# Allegro board AAST_BOARD V1.brd
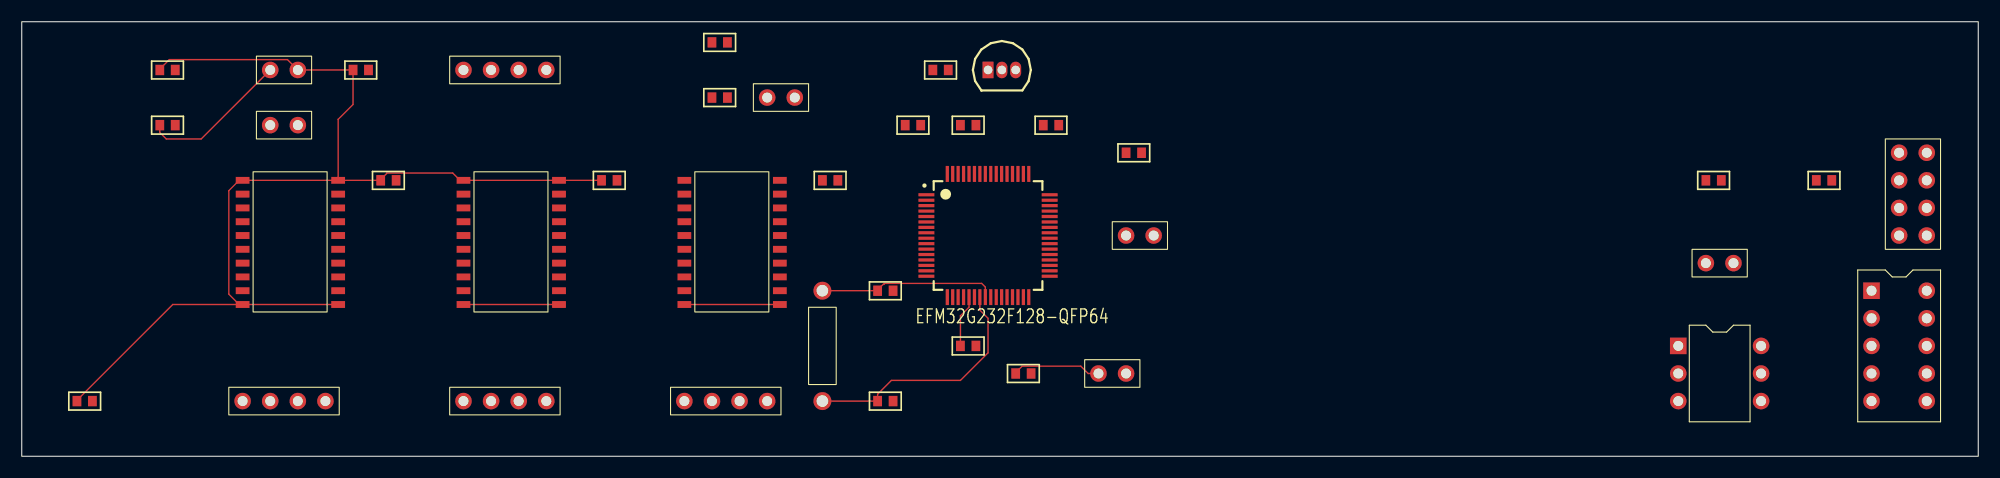
[diagram p0: board, top side]
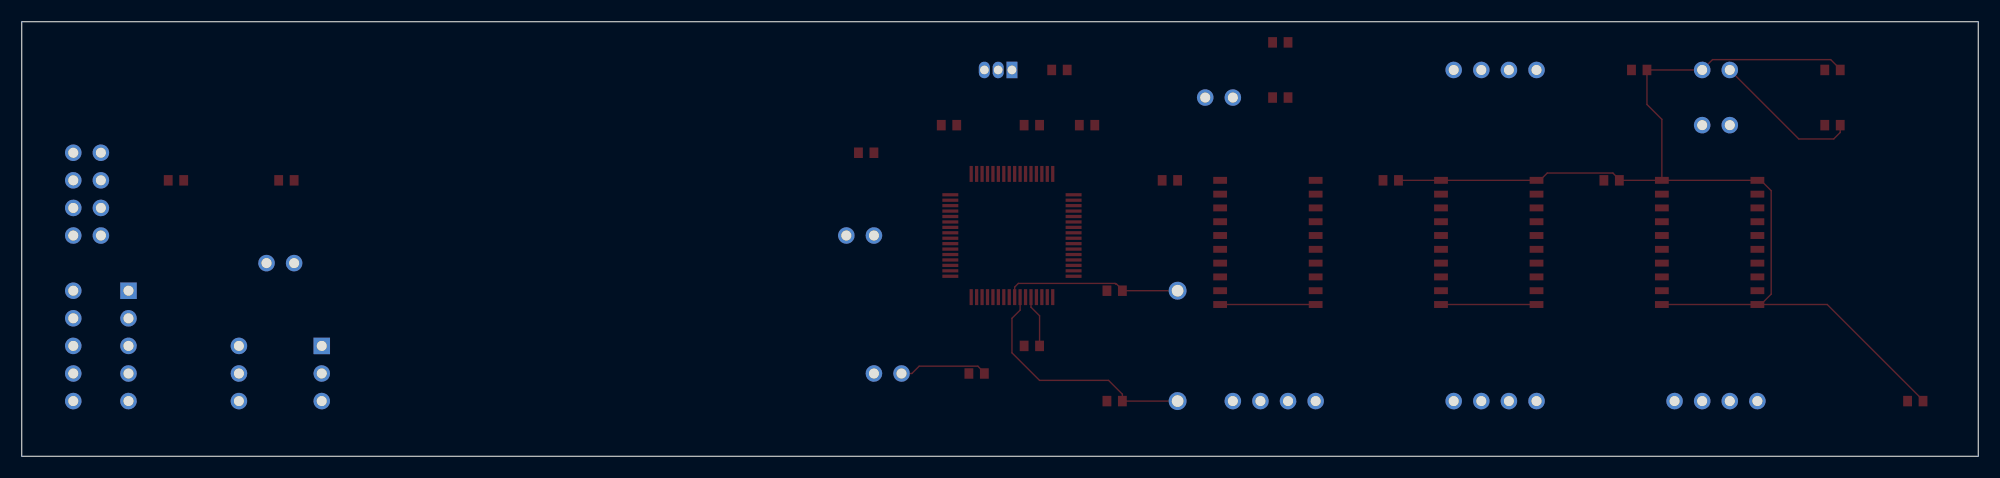
[diagram p1: board, bottom side, seen from below]

Outline 180 x 40 mm; copper layers: TOP, BOTTOM. Coordinates in mm from the lower left corner of the outline.
Outline path: rectangle 0,0 180,40

## Design rules (mm)
constraint set DEFAULT: min track width 0.127

## Placement (name value [footprint] x y rotation side)
C1  22pF  [SMC0603]  78.74 15.24 0 top
C2  22pF  [SMC0603]  78.74 5.08 0 top
C3  10pF  [SMC0603]  154.94 25.4 0 top
C4  10pF  [SMC0603]  86.36 30.48 0 top
C5  10pF  [SMC0603]  83.82 35.56 0 top
C6  10pF  [SMC0603]  93.98 30.48 0 top
C7  10pF  [SMC0603]  86.36 10.16 0 top
C8  10pF  [SMC0603]  73.66 25.4 0 top
C9  10pF  [SMC0603]  53.34 25.4 0 top
C10  10pF  [SMC0603]  33.02 25.4 0 top
C11  10pF  [SMC0603]  30.48 35.56 0 top
C12  10pF  [SMC0603]  165.1 25.4 0 top
C13  10pF  [SMC0603]  63.5 38.1 0 top
C14  10pF  [SMC0603]  5.08 5.08 0 top
C15  10pF  [SMC0603]  81.28 30.48 0 top
C16  10pF  [SMC0603]  12.7 35.56 0 top
D1  LED  [JUMPER2]  68.58 33.02 0 top
D2  LED  [JUMPER2]  99.06 7.62 0 top
D3  LED  [JUMPER2]  101.6 20.32 0 top
J1  HEADER 8  [JUMPER8]  172.72 20.32 0 top
J3  HEADER 6  [DIP6_3]  152.4 10.16 0 top
J5  HEADER 4  [JUMPER4]  20.32 5.08 0 top
J6  HEADER 4  [JUMPER4]  60.96 5.08 0 top
J13  HEADER 3  [JUMPER4]  40.64 5.08 0 top
J14  HEADER 3  [JUMPER4]  40.64 35.56 0 top
J15  HEADER 2  [JUMPER2]  154.94 17.78 0 top
J17  HEADER 2  [JUMPER2]  22.86 30.48 0 top
J18  HEADER 10  [DIP10_2]  170.18 15.24 0 top
R9  1K  [SMR0603]  12.7 30.48 0 top
R10  330  [SMR0603]  63.5 33.02 0 top
R11  330  [SMR0603]  91.44 7.62 0 top
R12  330  [SMR0603]  101.6 27.94 0 top
R891  10k  [JUMPER2]  22.86 35.56 0 top
U1  ATMEGA128-16AU  [TQFP64]  88.9 20.32 0 top
U2  L293DD  [SOIC20]  20.32 25.4 0 top
U3  L293DD  [SOIC20]  60.96 25.4 0 top
U4  L293DD  [SOIC20]  40.64 25.4 0 top
U5  LM35/SO  [TO92]  88.9 35.56 0 top
Y1  16MHz  [RES400]  73.66 5.08 0 top

## Library data of the parts
C1-C16 = CAP NP
D1-D3 = LED: User Part Number: ***
J1 = HEADER 8: User Part Number: ***
J3 = HEADER 6: Tolerance: ***; User Part Number: ***
J5 J6 = HEADER 4: User Part Number: ***
J13 J14 = HEADER 3: User Part Number: ***
J15 J17 = HEADER 2: User Part Number: ***
J18 = HEADER 10: Tolerance: ***; User Part Number: ***
R9-R12 = R
R891 = R: User Part Number: ***
U1 = ATMEGA128-16AU
U2-U4 = L293D_1: Tolerance: ***; User Part Number: ***
U5 = LM35/SO_1
Y1 = CRYSTAL: Tolerance: ***; User Part Number: ***

## Footprints (pads in the part's own frame, mm; a bottom-side part is the same pattern mirrored in y, then rotated)
DIP6_3
  rect 1.524x1.524 hole 0.914: 1(0,0)
  round 1.524 hole 0.914: 2(0,-2.54) 3(0,-5.08) 4(7.62,-5.08) 5(7.62,-2.54) 6(7.62,0)
DIP10_2
  rect 1.524x1.524 hole 0.914: 1(0,0)
  round 1.524 hole 0.914: 2(0,-2.54) 3(0,-5.08) 4(0,-7.62) 5(0,-10.16) 6(5.08,-10.16) 7(5.08,-7.62) 8(5.08,-5.08) 9(5.08,-2.54) 10(5.08,0)
JUMPER2
  round 1.524 hole 0.914: 1(0,0) 2(2.54,0)
JUMPER4
  round 1.524 hole 0.914: 1(0,0) 2(2.54,0) 3(5.08,0) 4(7.62,0)
JUMPER8
  round 1.524 hole 0.914: 1(0,0) 2(2.54,0) 3(0,2.54) 4(2.54,2.54) 5(0,5.08) 6(2.54,5.08) 7(0,7.62) 8(2.54,7.62)
RES400
  round 1.651 hole 1.067: 1(0,0) 2(0,10.16)
SMC0603
  rect 0.813x0.965 smd: 1(0,0) 2(1.422,0)
SMR0603
  rect 0.813x0.965 smd: 1(0,0) 2(1.422,0)
SOIC20
  rect 1.27x0.635 smd: 1(0,0) 2(0,-1.27) 3(0,-2.54) 4(0,-3.81) 5(0,-5.08) 6(0,-6.35) 7(0,-7.62) 8(0,-8.89) 9(0,-10.16) 10(0,-11.43) 11(8.788,-11.43) 12(8.788,-10.16) 13(8.788,-8.89) 14(8.788,-7.62) 15(8.788,-6.35) 16(8.788,-5.08) 17(8.788,-3.81) 18(8.788,-2.54) 19(8.788,-1.27) 20(8.788,0)
TO92
  rect 1.016x1.524 hole 0.787: 1(0,0)
  oval 1.016x1.524 hole 0.787: 2(1.27,0) 3(2.54,0)
TQFP64
  rect 1.47x0.3 smd: 1(-5.67,3.75) 2(-5.67,3.25) 3(-5.67,2.75) 4(-5.67,2.25) 5(-5.67,1.75) 6(-5.67,1.25) 7(-5.67,0.75) 8(-5.67,0.25) 9(-5.67,-0.25) 10(-5.67,-0.75) 11(-5.67,-1.25) 12(-5.67,-1.75) 13(-5.67,-2.25) 14(-5.67,-2.75) 15(-5.67,-3.25) 16(-5.67,-3.75) 33(5.67,-3.75) 34(5.67,-3.25) 35(5.67,-2.75) 36(5.67,-2.25) 37(5.67,-1.75) 38(5.67,-1.25) 39(5.67,-0.75) 40(5.67,-0.25) 41(5.67,0.25) 42(5.67,0.75) 43(5.67,1.25) 44(5.67,1.75) 45(5.67,2.25) 46(5.67,2.75) 47(5.67,3.25) 48(5.67,3.75)
  rect 0.3x1.47 smd: 17(-3.75,-5.67) 18(-3.25,-5.67) 19(-2.75,-5.67) 20(-2.25,-5.67) 21(-1.75,-5.67) 22(-1.25,-5.67) 23(-0.75,-5.67) 24(-0.25,-5.67) 25(0.25,-5.67) 26(0.75,-5.67) 27(1.25,-5.67) 28(1.75,-5.67) 29(2.25,-5.67) 30(2.75,-5.67) 31(3.25,-5.67) 32(3.75,-5.67) 49(3.75,5.67) 50(3.25,5.67) 51(2.75,5.67) 52(2.25,5.67) 53(1.75,5.67) 54(1.25,5.67) 55(0.75,5.67) 56(0.25,5.67) 57(-0.25,5.67) 58(-0.75,5.67) 59(-1.25,5.67) 60(-1.75,5.67) 61(-2.25,5.67) 62(-2.75,5.67) 63(-3.25,5.67) 64(-3.75,5.67)

## Nets
+5V: C3.1 C4.1 C5.1 C6.1 C7.1 C8.1 C9.1 C10.1 C11.1 C12.1 C13.1 C14.1 C15.1 C16.1 J1.1 J3.5 J15.1 J18.1 R10.1 R891.2 U1.21 U1.52 U1.62 U1.64 U2.1 U2.10 U2.11 U2.20(VSS) U3.1 U3.10 U3.11 U3.20(VSS) U4.1 U4.10 U4.11 U4.20(VSS) U5.1(VS+)
GND: C1.2 C2.2 C3.2 C4.2 C5.2 C6.2 C7.2 C8.2 C9.2 C10.2 C11.2 C12.2 C13.2 C14.2 C15.2 C16.2 D1.1(CATHODE) J1.8 J3.6 J13.1 J14.1 J15.2 J18.9 R9.2 R11.2 R12.2 U1.22 U1.53 U1.63 U2.4 U2.5 U2.6 U2.7 U2.14 U2.15 U2.16 U2.17 U3.4 U3.5 U3.6 U3.7 U3.14 U3.15 U3.16 U3.17 U4.4 U4.5 U4.6 U4.7 U4.9 U4.14 U4.15 U4.16 U4.17 U5.3
#FAN1: J13.2 U4.13
#FAN2: J14.2 U4.18
#GUN_TRIGGER: J17.1 U4.3
#XA: J5.1 U2.3
#XABAR: J5.3 U2.13
#XB: J5.2 U2.8
#XBBAR: J5.4 U2.18
#YA: J6.1 U3.3
#YABAR: J6.3 U3.13
#YB: J6.2 U3.8
#YBBAR: J6.4 U3.18
BUTTON1: J18.7 U1.26
BUTTON2: J18.8 U1.27
CLK_R_A: J1.2 U1.25
CS: J18.2 U1.10
FAN: U1.15 U4.12 U4.19
GUN_TRIGGER: D2.2 U1.33 U4.2
MISO: J3.3 U1.13
MOSI: J3.2 J18.4 U1.12
OVR_R_A: J1.7 U1.28
RESET: J3.4 U1.20(~RESET)
RX: J18.5 U1.61
RY: J18.6 U1.60
SCK: J3.1 J18.3 U1.11
X+_R_A: J1.3 U1.29
X-_R_A: J1.4 U1.30
XA: U1.35 U2.2
XABAR: U1.37 U2.12
XB: U1.36 U2.9
XBBAR: U1.38 U2.19
Y+_R_A: J1.5 U1.31
Y-_R_A: J1.6 U1.32
YA: U1.39 U3.2
YABAR: U1.41 U3.12
YB: U1.40 U3.9
YBBAR: U1.42 U3.19
N00631: C2.1 U1.23 Y1.1
N00638: C1.1 U1.24 Y1.2
N07111: U1.59 U5.2
N29275: R9.1 R891.1 U1.58
N29722: D1.2 R10.2
N30121: D3.2 U1.34
N30488: D3.1(CATHODE) R12.1
N298271: D2.1(CATHODE) R11.1

Pads without a net: J13 3 4; J14 3 4; J17 2; J18 10; U1 1 2 3 4 5 6 7 8 9 14 16 17 18 19 43 44 45 46 47 48 49 50 51 54 55 56 57; U4 8

## Routing (per net, layer and track width the routed paths; a pad name or vN(x,y) marks a point on that pad's centre or on a via; arc(x,y) is an arc through that point)
+5V: length 125.7
  TOP w0.127: 20,13.97 19.05,14.92 19.05,24.45 20,25.4 U2.1 U2.20 ; 20,13.97 13.89,13.97 5.08,5.16 C14.1 ; 20,13.97 U2.10 U2.11 ; U2.20 29.11,31.01 30.48,32.38 C11.1 R891.2 24.45,36.51 13.58,36.51 12.7,35.64 C16.1 ; U2.20 C10.1 33.02,25.48 33.62,26.07 39.65,26.07 40.32,25.4 U4.1 U4.20 C9.1 ; U3.11 U3.10 ; U4.10 U4.11 ; U1.21 87.15,13.72 86.36,12.93 C7.1
N00631: length 22.9
  TOP w0.127: U1.23 88.15,13.45 88.9,12.7 88.9,9.53 86.36,6.99 80.01,6.99 78.74,5.71 C2.1 Y1.1
N00638: length 16.4
  TOP w0.127: U1.24 88.65,15.58 88.31,15.91 79.41,15.91 79.36,15.86 79.28,15.86 78.74,15.32 C1.1 Y1.2
N29275: length 13.7
  TOP w0.127: R9.1 12.7,29.81 13.3,29.21 16.51,29.21 R891.1
N298271: length 8.2
  TOP w0.127: R11.1 91.44,7.7 92.04,8.29 97.43,8.29 98.11,7.62 D2.1
